# EAGLE board version1 (EAGLE 6.1)
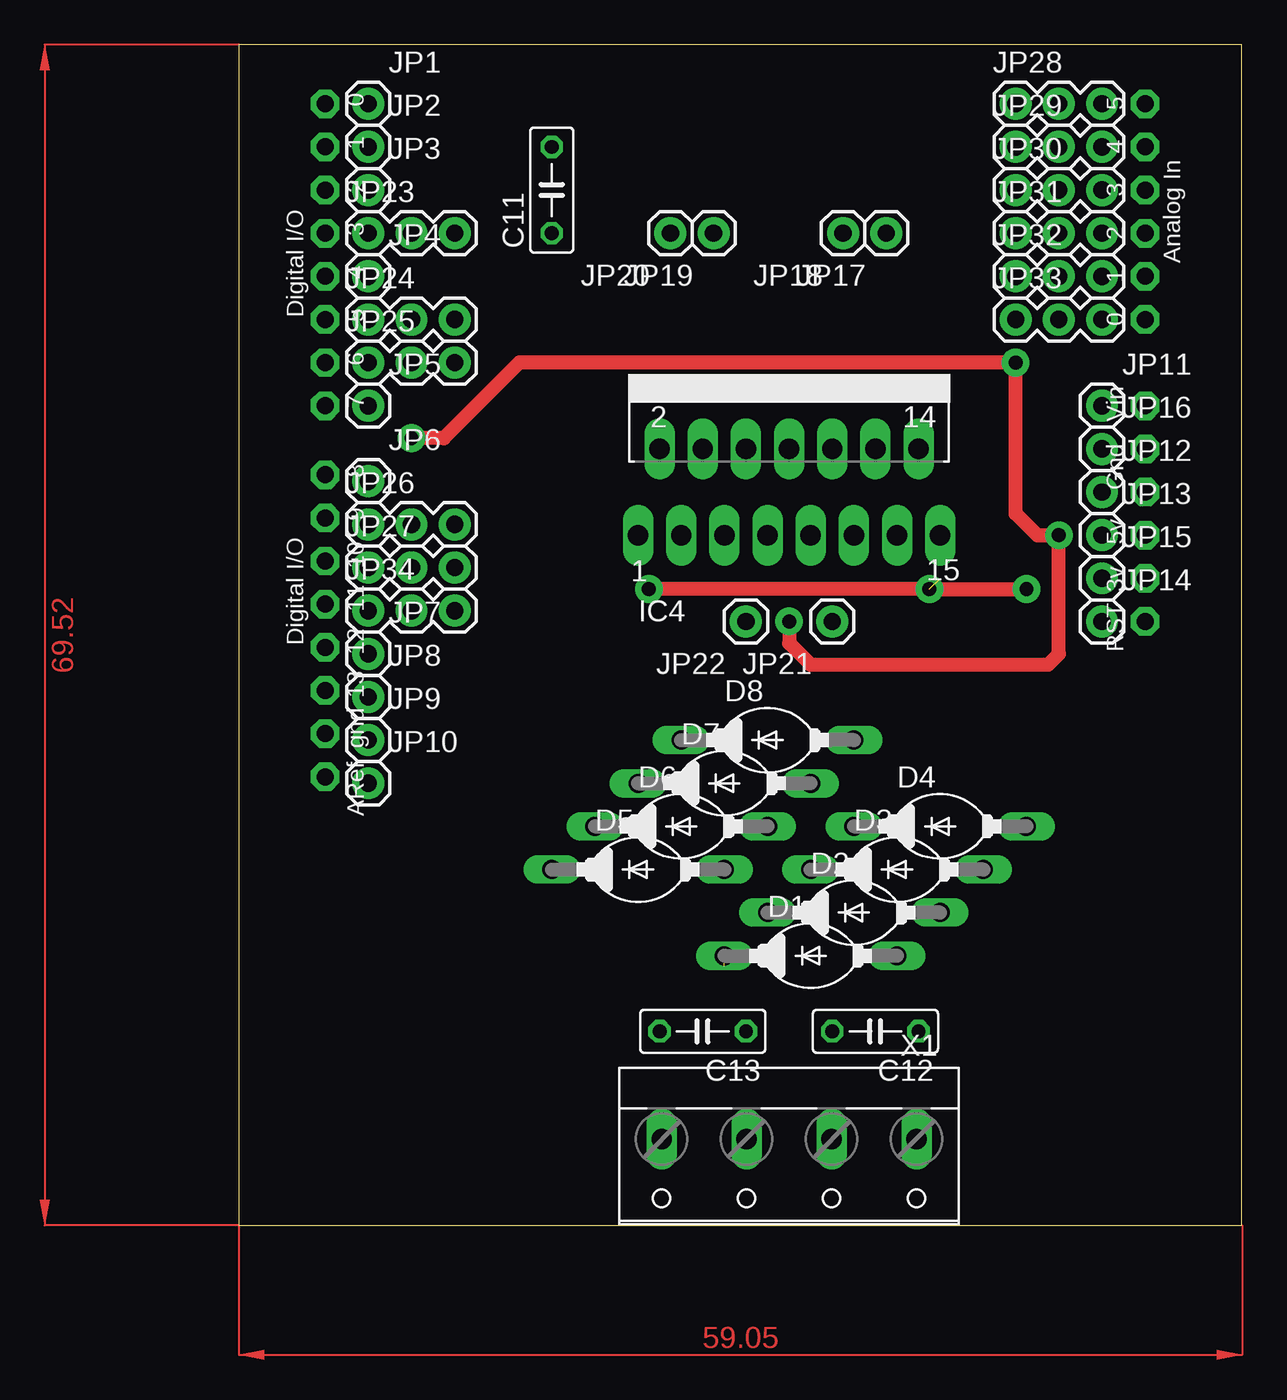
[diagram p0: board, top side]
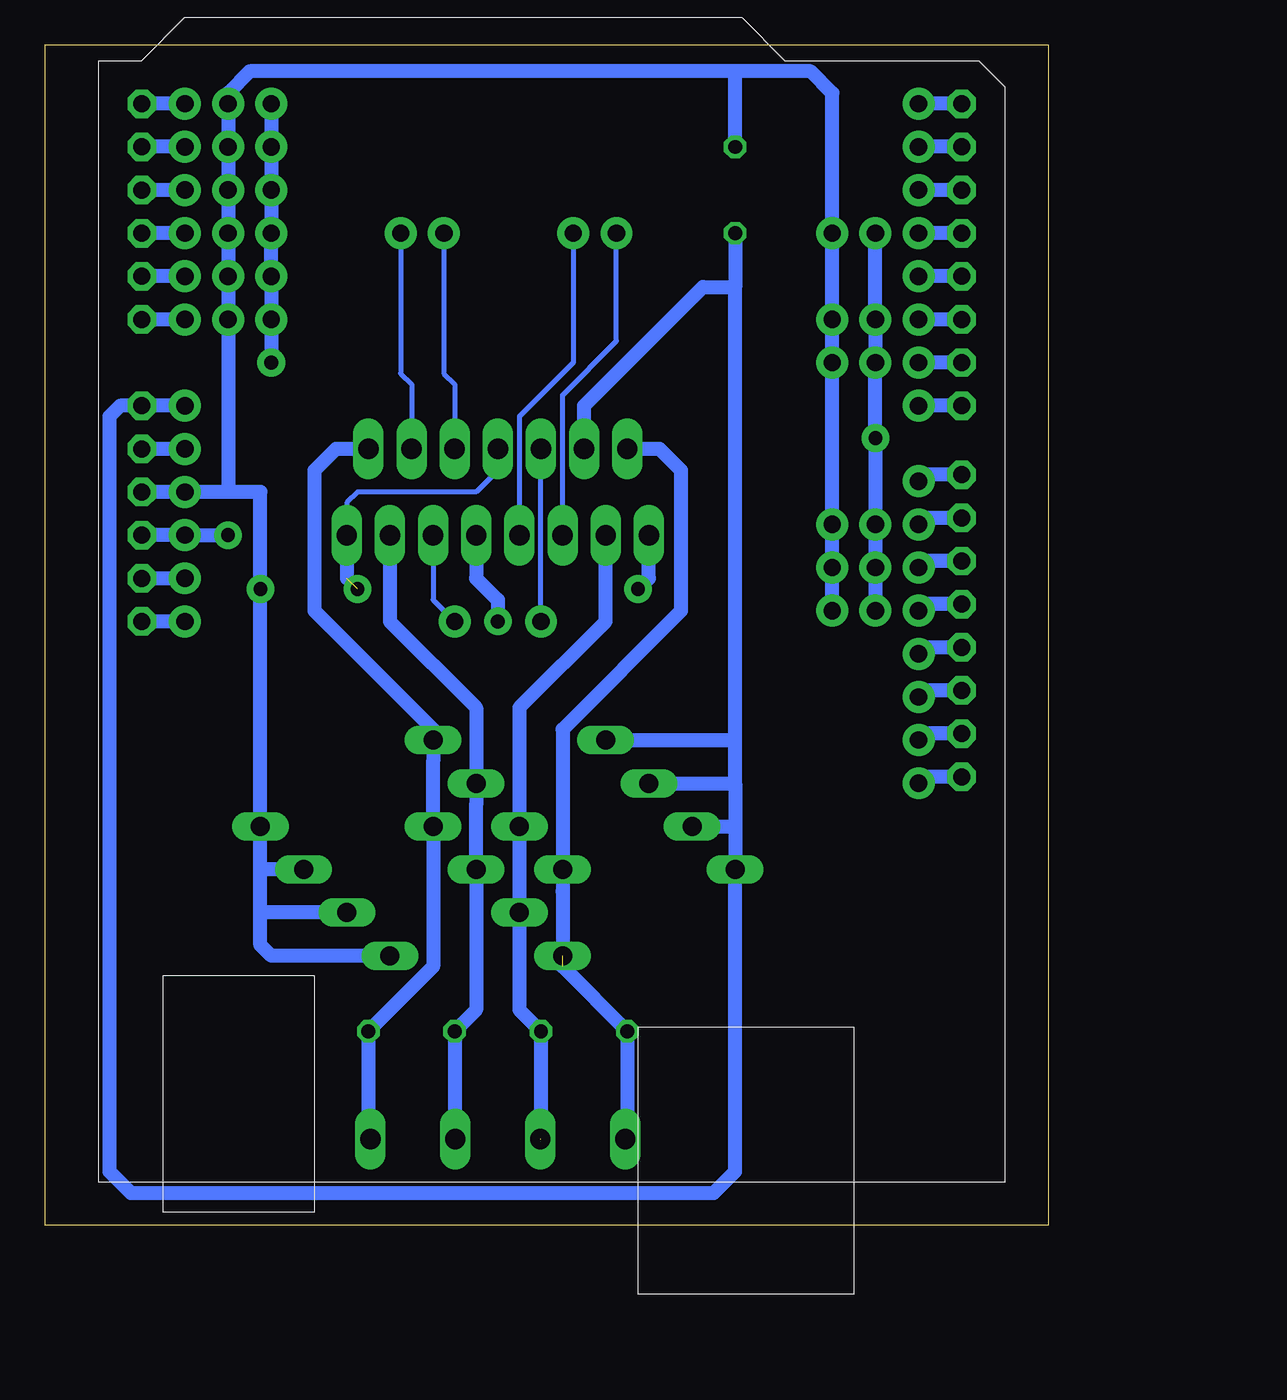
[diagram p1: board, bottom side, seen from below]

Size 59.03 x 69.52 mm. Coordinates in mm from the lower left corner, seen from the top.
Outline: 0,0 59.03,0 59.03,69.52 0,69.52 0,0
Copper layers (1*16): Top 0.035mm / dielectric 1.5mm / Bottom 0.035mm
Design rules: minimum track width 10mil, minimum drill 24mil, track to track 11mil, track to pad 11mil, pad to pad 12mil, via to via 12mil, smd to smd 12mil, copper to edge 40mil, drill to drill 8mil, minimum pad ring 10mil, minimum via ring 8mil, stop-mask expansion 4mil, vias tented up to drill 0mil, thermal gap 10mil

## Footprints (pad centres in the part's own frame; a part is rotated, then mirrored left to right if it is on the bottom)
C050-025X075 = drill 0.813 octagon: 1 -2.54,0; 2 2.54,0
DO204-10 = drill 1.118 long: A 5.08,0; C -5.08,0
MULTIWATT-15 = drill 1.2 long: 1 -8.89,-7.62; 2 -7.62,-2.54; 3 -6.35,-7.62; 4 -5.08,-2.54; 5 -3.81,-7.62; 6 -2.54,-2.54; 7 -1.27,-7.62; 8 0,-2.54; 9 1.27,-7.62; 10 2.54,-2.54; 11 3.81,-7.62; 12 5.08,-2.54; 13 6.35,-7.62; 14 7.62,-2.54; 15 8.89,-7.62
1X01 = drill 1.016 pad 1.88: 1 0,0
1X03 = drill 1.016 pad 1.88: 1 0,0; 2 2.54,0; 3 5.08,0
ARDUINO-NOHOLE = drill 1 pad 1.676 octagon: 3V 35.56,2.54; 5V 38.1,2.54; A0 50.8,2.54; A1 53.34,2.54; A2 55.88,2.54; A3 58.42,2.54; A4 60.96,2.54; A5 63.5,2.54; AREF 23.876,50.8; D0 63.5,50.8; D1 60.96,50.8; D2 58.42,50.8; D3 55.88,50.8; D4 53.34,50.8; D5 50.8,50.8; D6 48.26,50.8; D7 45.72,50.8; D8 41.656,50.8; D9 39.116,50.8; D10 36.576,50.8; D11 34.036,50.8; D12 31.496,50.8; D13 28.956,50.8; GND 26.416,50.8; GND1 43.18,2.54; GND2 40.64,2.54; RESET 33.02,2.54; VIN 45.72,2.54
W237-4 = drill 1.194 long: 1 -7.5,-1.27; 2 -2.5,-1.27; 3 2.5,-1.27; 4 7.5,-1.27

## Placement (x,y rotation side)
C11  100uF  [C050-025X075]  18.41,60.96 90 top
C12  1uF  [C050-025X075]  37.47,11.43 180 top
C13  1uF  [C050-025X075]  27.3,11.43 180 top
D1  1N5059  [DO204-10]  33.66,15.88 0 top
D2  1N5059  [DO204-10]  36.2,18.41 0 top
D3  1N5059  [DO204-10]  38.73,20.95 0 top
D4  1N5059  [DO204-10]  41.27,23.5 0 top
D5  1N5059  [DO204-10]  23.5,20.95 0 top
D6  1N5059  [DO204-10]  26.04,23.5 0 top
D7  1N5059  [DO204-10]  28.57,26.04 0 top
D8  1N5059  [DO204-10]  31.11,28.57 0 top
IC4  L298  [MULTIWATT-15]  32.38,48.26 0 top
JP1  M01PTH  [1X01]  7.62,66.04 0 top
JP2  M01PTH  [1X01]  7.62,63.5 0 top
JP3  M01PTH  [1X01]  7.62,60.96 0 top
JP4  M01PTH  [1X01]  7.62,55.88 0 top
JP5  M01PTH  [1X01]  7.62,48.26 0 top
JP6  M01PTH  [1X01]  7.62,43.81 0 top
JP7  M01PTH  [1X01]  7.62,33.66 0 top
JP8  M01PTH  [1X01]  7.62,31.11 0 top
JP9  M01PTH  [1X01]  7.62,28.57 0 top
JP10  M01PTH  [1X01]  7.62,26.04 0 top
JP11  M01PTH  [1X01]  50.8,48.26 0 top
JP12  M01PTH  [1X01]  50.8,43.18 0 top
JP13  M01PTH  [1X01]  50.8,40.64 0 top
JP14  M01PTH  [1X01]  50.8,35.56 0 top
JP15  M01PTH  [1X01]  50.8,38.1 0 top
JP16  M01PTH  [1X01]  50.8,45.72 0 top
JP17  M01PTH  [1X01]  38.1,58.42 180 top
JP18  M01PTH  [1X01]  35.56,58.42 180 top
JP19  M01PTH  [1X01]  27.94,58.42 180 top
JP20  M01PTH  [1X01]  25.4,58.42 180 top
JP21  M01PTH  [1X01]  34.92,35.56 180 top
JP22  M01PTH  [1X01]  29.84,35.56 180 top
JP23  [1X03]  7.62,58.42 0 top
JP24  [1X03]  7.62,53.34 0 top
JP25  [1X03]  7.62,50.8 0 top
JP26  [1X03]  7.62,41.27 0 top
JP27  [1X03]  7.62,38.73 0 top
JP28  [1X03]  45.72,66.04 0 top
JP29  [1X03]  45.72,63.5 0 top
JP30  [1X03]  45.72,60.96 0 top
JP31  [1X03]  45.72,58.42 0 top
JP32  [1X03]  45.72,55.88 0 top
JP33  [1X03]  45.72,53.34 0 top
JP34  [1X03]  7.62,36.2 0 top
U$1  ARDUINO-NOHOLE  [ARDUINO-NOHOLE]  55.88,2.54 90 top
X1  [W237-4]  32.38,3.81 180 top

## Library data of the parts
C11-C13 = rcl
D1-D8 = diode
IC4 = st-microelectronics; MPN: L298N; OC_FARNELL: 1589425; OC_NEWARK: 32M1527
JP1-JP34 = SparkFun
U$1 = adafruit
X1 = con-wago-500; OC_FARNELL: unknown; OC_NEWARK: unknown

## Nets
N$1: JP1.1 U$1.D0
N$2: JP2.1 U$1.D1
N$3: JP28.3 U$1.A5
N$4: JP3.1 U$1.D2
N$5: JP4.1 U$1.D4
N$6: JP29.3 U$1.A4
N$7: JP5.1 U$1.D7
N$8: JP6.1 U$1.D8
N$9: JP30.3 U$1.A3
N$10: JP7.1 U$1.D12
N$11: JP8.1 U$1.D13
N$12: JP31.3 U$1.A2
N$13: JP9.1 U$1.GND
N$14: JP23.1 U$1.D3
N$15: JP24.1 U$1.D5
N$16: JP33.3 U$1.A0
N$17: JP32.3 U$1.A1
N$18: JP10.1 U$1.AREF
N$19: JP14.1 U$1.RESET
N$20: JP25.1 U$1.D6
N$21: JP15.1 U$1.3V
N$22: JP16.1 U$1.GND1
N$23: JP27.1 U$1.D10
N$24: C13.2 D1.C D5.A IC4.2 X1.4
N$25: C13.1 D2.C D6.A IC4.3 X1.3
N$26: JP34.1 U$1.D11
N$27: C12.2 D3.C D7.A IC4.13 X1.2
N$28: C12.1 D4.C D8.A IC4.14 X1.1
N$29: IC4.6 JP22.1
N$30: JP26.1 U$1.D9
N$31: IC4.11 JP21.1
N$32: IC4.12 JP17.1
N$33: IC4.10 JP18.1
N$34: IC4.7 JP19.1
N$35: IC4.5 JP20.1
VDD: IC4.9 JP13.1 JP23.2 JP24.2 JP25.2 JP26.2 JP27.2 JP28.1 JP29.1 JP30.1 JP31.1 JP32.1 JP33.1 JP34.2 U$1.5V
VPP: C11.1 D5.C D6.C D7.C D8.C IC4.4 JP11.1 U$1.VIN
VSS: C11.2 D1.A D2.A D3.A D4.A IC4.1 IC4.8 IC4.15 JP12.1 JP23.3 JP24.3 JP25.3 JP26.3 JP27.3 JP28.2 JP29.2 JP30.2 JP31.2 JP32.2 JP33.2 JP34.3 U$1.GND2

## Tracks (layer width: path | path; a pad name or v marks a point on that pad's centre or on a via)
N$1
  Bottom 0.813: U$1.D0 JP1.1
N$2
  Bottom 0.813: U$1.D1 JP2.1
N$3
  Bottom 0.813: JP28.3 U$1.A5
N$4
  Bottom 0.813: U$1.D2 JP3.1
N$5
  Bottom 0.813: U$1.D4 JP4.1
N$6
  Bottom 0.813: JP29.3 U$1.A4
N$7
  Bottom 0.813: U$1.D7 JP5.1
N$8
  Bottom 0.813: U$1.D8 7.24,44.2 JP6.1
N$9
  Bottom 0.813: JP30.3 U$1.A3
N$10
  Bottom 0.813: U$1.D12 7.24,34.04 JP7.1
N$11
  Bottom 0.813: U$1.D13 7.24,31.5 JP8.1
N$12
  Bottom 0.813: JP31.3 U$1.A2
N$13
  Bottom 0.813: U$1.GND 7.24,28.96 JP9.1
N$14
  Bottom 0.813: U$1.D3 JP23.1
N$15
  Bottom 0.813: U$1.D5 JP24.1
N$16
  Bottom 0.813: JP33.3 U$1.A0
N$17
  Bottom 0.813: JP32.3 U$1.A1
N$18
  Bottom 0.813: U$1.AREF 7.24,26.42 JP10.1
N$19
  Bottom 0.813: JP14.1 U$1.RESET
N$20
  Bottom 0.813: U$1.D6 JP25.1
N$21
  Bottom 0.813: JP15.1 U$1.3V
N$22
  Bottom 0.813: JP16.1 U$1.GND1
N$23
  Bottom 0.813: U$1.D10 7.24,39.12 JP27.1
N$24  (1 unrouted)
  Bottom 0.813: X1.4 24.89,5.83 24.77,5.96 C13.2 28.57,15.24 28.57,19.68 D5.A 28.57,29.21 21.59,36.2 21.59,44.45 22.86,45.72 IC4.2
N$25  (1 unrouted)
  Bottom 0.813: IC4.3 26.04,35.56 31.11,30.48 D6.A 31.11,22.23 D2.C 31.11,12.7 C13.1 29.84,5.08
N$26
  Bottom 0.813: U$1.D11 7.24,36.58 JP34.1
N$27
  Bottom 0.813: X1.2 34.88,11.39 C12.2 33.66,12.7 D3.C 33.66,24.77 D7.A 33.66,30.48 38.73,35.56 IC4.13
N$28
  Bottom 0.813: X1.1 39.88,5.83 40.01,5.96 C12.1 36.2,15.24 D4.C 36.2,27.3 D8.A 36.2,29.21 43.18,36.2 43.18,44.45 41.91,45.72 IC4.14
N$29
  Bottom 0.305: JP22.1 IC4.6
N$30
  Bottom 0.813: U$1.D9 7.24,41.66 JP26.1
N$31
  Bottom 0.305: IC4.11 36.2,36.83 JP21.1
N$32
  Bottom 0.305: JP17.1 38.1,50.16 37.47,49.53 IC4.12
N$33
  Bottom 0.305: JP18.1 35.56,50.16 34.92,49.53 IC4.10
N$34
  Bottom 0.305: JP19.1 27.94,50.8 31.11,47.62 IC4.7
N$35
  Bottom 0.305: IC4.5 28.57,48.9 25.4,52.07 JP20.1
VDD  (via drill 0.81 pad 1.63)
  Top 0.813: v10.16,46.35 12.06,46.35 16.51,50.8 v45.72,50.8 45.72,41.91 46.99,40.64 v48.26,40.64 48.26,33.66 47.62,33.02 33.66,33.02 32.38,34.29 v32.38,35.56
  Bottom 0.813: U$1.5V JP13.1 v48.26,40.64 | JP34.2 JP27.2 JP26.2 v10.16,46.35 JP25.2 JP24.2 JP23.2 | JP28.1 JP29.1 JP30.1 JP31.1 JP32.1 JP33.1 v45.72,50.8 | IC4.9 33.66,38.1 32.38,36.83 v32.38,35.56
VPP
  Bottom 0.813: IC4.4 27.3,48.26 20.32,55.24 18.41,55.24 | 18.41,26.04 18.41,23.5 | 18.41,23.5 D5.C 18.41,3.17 19.68,1.91 53.98,1.91 55.24,3.17 55.24,47.62 54.61,48.26 U$1.VIN JP11.1 | D6.C 18.41,23.5 | D7.C 18.41,26.04 | C11.1 18.41,55.24 | 18.41,26.04 18.41,28.57 | 18.41,28.57 18.41,55.24 | D8.C 18.41,28.57
VSS  (via drill 0.81 pad 1.63)  (1 unrouted)
  Top 0.813: v24.13,37.47 v40.64,37.47 v46.35,37.47
  Bottom 0.305: IC4.8 32.38,44.45 33.66,43.18 40.64,43.18 41.27,42.55 IC4.15
  Bottom 0.813: U$1.GND2 JP12.1 48.26,43.18 | JP34.3 JP27.3 JP26.3 JP25.3 JP24.3 JP23.3 12.7,66.67 13.97,67.94 18.41,67.94 | 48.26,43.18 JP33.2 JP32.2 JP31.2 JP30.2 JP29.2 JP28.2 48.26,66.67 46.99,67.94 18.41,67.94 | IC4.15 41.27,38.1 | v24.13,37.47 23.5,38.1 IC4.1 | D1.A 45.72,15.88 46.35,16.51 46.35,18.41 | 46.35,18.41 46.35,20.95 | D2.A 46.35,18.41 | D3.A 46.35,20.95 | C11.2 18.41,67.94 | 46.35,20.95 D4.A v46.35,37.47 46.35,43.18 48.26,43.18
(copper drawn outside any net)
  shapes: Top area x2